# EAGLE board sensor (EAGLE 7.3.0)
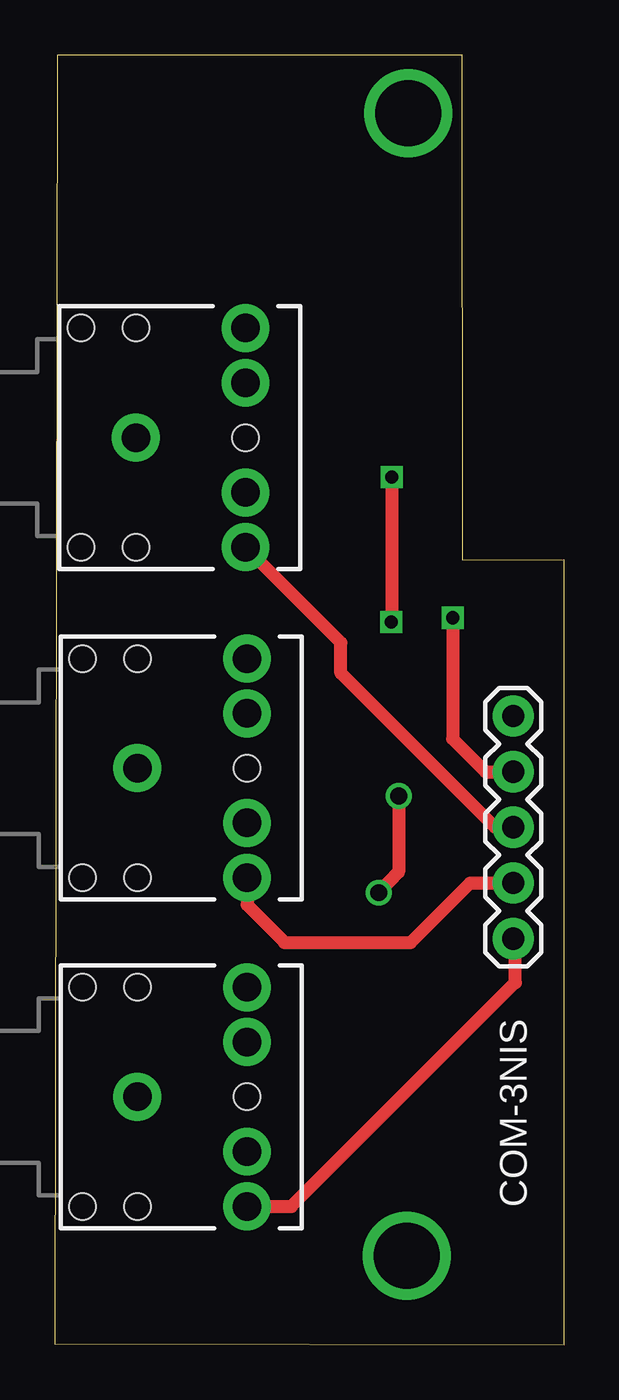
[diagram p0: board, top side]
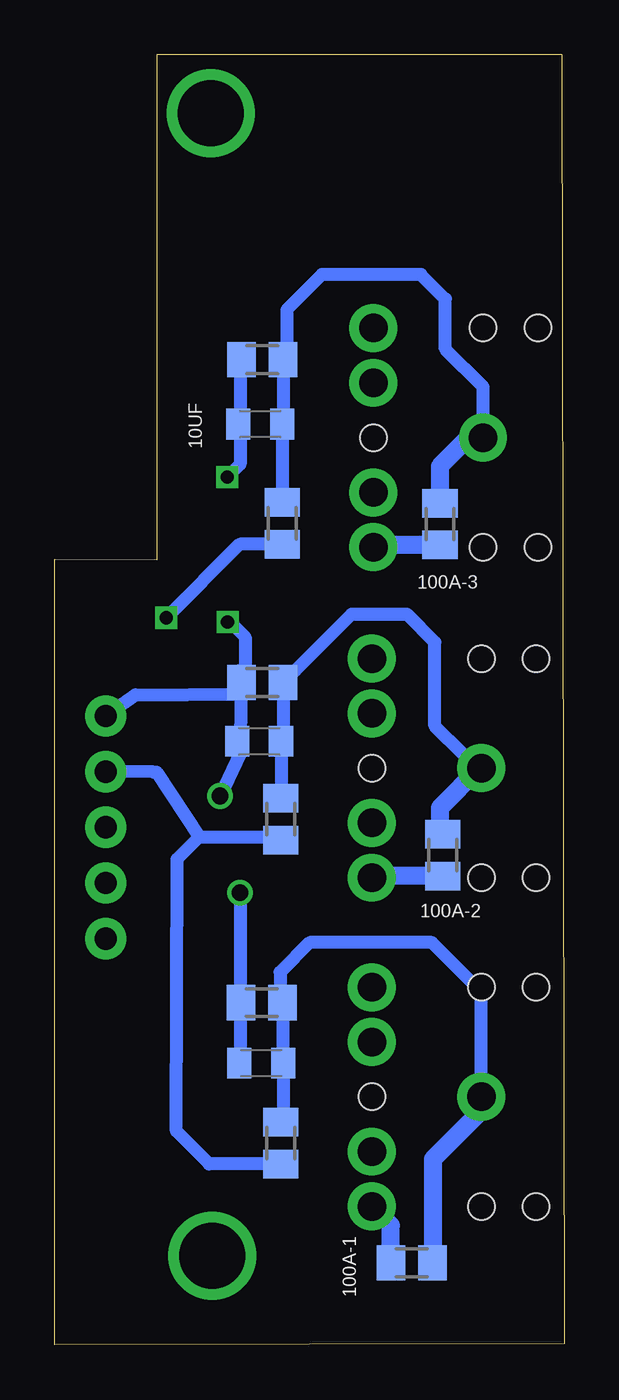
[diagram p1: board, bottom side, seen from below]

Size 23.23 x 58.86 mm. Coordinates in mm from the lower left corner, seen from the top.
Outline: 0,0.04 23.23,0 23.23,35.82 18.58,35.8 18.57,58.86 0.11,58.86 0,0.04
Copper layers (1*16): Top 0.035mm / dielectric 1.5mm / Bottom 0.035mm
Design rules "default": minimum track width 0.6mm, minimum drill 30mil, track to track 20mil, track to pad 20mil, pad to pad 20mil, via to via 20mil, smd to smd 8mil, copper to edge 8mil, drill to drill 8mil, minimum pad ring 10mil, minimum via ring 8mil, stop-mask expansion 4mil, vias tented up to drill 0mil, thermal gap 10mil

## Footprints (pad centres in the part's own frame; a part is rotated, then mirrored left to right if it is on the bottom)
M0805 = smd 1.3 x 1.6: 1 -0.95,0; 2 0.95,0
C0805K = smd 1.1 x 1.4: 1 -1,0; 2 1,0
1X05 = drill 1.016 pad 1.88: 1 0,0; 2 2.54,0; 3 5.08,0; 4 7.62,0; 5 10.16,0
AUDIO-JACK = drill 1.3 pad 2.184: RING 5,5; RSH 5,2.5; SLEEVE 0,0; TIP 5,-5; TSH 5,-2.5 | hole 1.2: 0,5; -2.5,5; -2.5,-5; 0,-5; 5,0

## Placement (x,y rotation side)
1  10k  [M0805]  13.76,44.95 0 bottom
2  10K  [M0805]  12.86,37.48 270 bottom
3  10k  [M0805]  13.77,30.22 0 bottom
4  10K  [M0805]  12.92,23.98 270 bottom
5  10K  [M0805]  13.79,15.61 0 bottom
6  10K  [M0805]  12.92,9.2 270 bottom
10UF  [C0805K]  13.86,42.01 180 bottom
100A-1  33  [M0805]  6.95,3.74 0 bottom
100A-2  33  [M0805]  5.54,22.34 90 bottom
100A-3  33  [M0805]  5.66,37.44 90 bottom
C2  10uF  [C0805K]  13.91,27.53 180 bottom
C3  10uF  [C0805K]  13.81,12.85 180 bottom
COM-3NIS  [1X05]  20.91,28.69 270 top
U1  NON-INVASIVE SENSOR 1  [AUDIO-JACK]  3.77,11.31 0 top
U2  NON-INVASIVE SENSOR 2  [AUDIO-JACK]  3.77,26.31 0 top
U3  NON-INVASIVE SENSOR 3  [AUDIO-JACK]  3.7,41.39 0 top

## Library data of the parts
1-6 10UF 100A-1-100A-3 C2 C3 = adafruit
COM-3NIS U1-U3 = SparkFun-Connectors

## Nets
N$1: 2.2 4.2 6.2 COM-3NIS.2
N$2: 100A-3.1 COM-3NIS.3 U3.TIP
N$3: 100A-2.1 COM-3NIS.4 U2.TIP
N$4: 100A-1.1 COM-3NIS.5 U1.TIP
N$5: 1.2 2.1 10UF.1 100A-3.2 U3.SLEEVE
N$9: 3.2 4.1 100A-2.2 C2.1 U2.SLEEVE
N$14: 5.2 6.1 100A-1.2 C3.1 U1.SLEEVE
N$20: 1.1 3.1 5.1 10UF.2 C2.2 C3.2 COM-3NIS.1

## Tracks (layer width: path | path; a pad name or v marks a point on that pad's centre or on a via)
N$1  (via drill 0.6)
  Top 0.6: v18.15,33.17 18.15,27.65 19.65,26.14 COM-3NIS.2
  Bottom 0.6: 16.63,23.16 13.51,23.16 4.2 | 16.63,23.16 18.59,26.12 18.78,26.14 COM-3NIS.2 | 6.2 16.19,8.25 17.69,9.75 17.65,22.16 16.63,23.16 | 2.2 14.79,36.53 v18.15,33.17
N$2
  Top 0.6: COM-3NIS.3 20.09,23.61 13.05,30.65 13.05,32.04 U3.TIP
  Bottom 0.813: 100A-3.1 8.6,36.49 U3.TIP
N$3
  Top 0.6: U2.TIP 8.77,20.07 10.49,18.35 16.23,18.35 18.95,21.07 COM-3NIS.4
  Bottom 0.813: 100A-2.1 8.69,21.39 U2.TIP
N$4
  Top 0.6: U1.TIP 10.79,6.31 21.01,16.53 21.01,18.43 COM-3NIS.5
  Bottom 0.813: 100A-1.1 7.9,5.44 U1.TIP
N$5
  Bottom 0.6: U3.SLEEVE 3.7,43.72 5.41,45.43 5.41,47.71 6.53,48.83 11.05,48.83 12.65,47.23 12.65,45.12 1.2 12.81,42.05 10UF.1 2.1
  Bottom 0.813: U3.SLEEVE 4.36,41.39 5.66,40.09 100A-3.2
N$9
  Bottom 0.6: U2.SLEEVE 4.62,26.97 5.89,28.24 5.89,32.05 7.16,33.32 9.7,33.32 12.24,30.78 3.2 12.82,27.62 C2.1 4.1
  Bottom 0.813: U2.SLEEVE 3.86,26.31 5.67,24.5 5.67,23.42 100A-2.2
N$12  (via drill 3)
  other vias: 16.05,4.06
N$14
  Bottom 0.6: 6.1 12.81,10.26 C3.1 12.81,15.58 5.2 12.95,15.72 12.95,16.99 11.59,18.35 6.03,18.35 3.77,16.09 U1.SLEEVE
  Bottom 0.813: U1.SLEEVE 3.77,10.68 5.98,8.47 5.98,3.76 100A-1.2
N$16  (via drill 3)
  other vias: 16.12,56.19
N$20  (via drill 0.6, 0.76)
  Top 0.6: v14.78,20.62 15.68,21.57 v15.69,25.04 | v15.37,39.59 15.37,32.99 v15.35,32.97
  Bottom 0.6: 14.78,42.21 14.78,44.75 1.1 | 14.78,15.54 14.78,13 C3.2 | 14.74,29.69 14.78,26.97 | 14.74,29.69 19.54,29.65 COM-3NIS.1 | 14.74,29.69 3.1 | v14.78,20.62 14.78,15.54 | 14.78,26.97 v15.69,25.04 | 14.78,15.54 5.1 | 14.78,26.97 C2.2 | 14.78,42.21 10UF.2 | 14.78,30.78 3.1 | 14.78,42.21 14.78,40.18 v15.37,39.59 | v15.35,32.97 15.23,32.97 14.55,32.29 14.55,30.39 3.1